# EAGLE board SpringX (EAGLE 6.4)
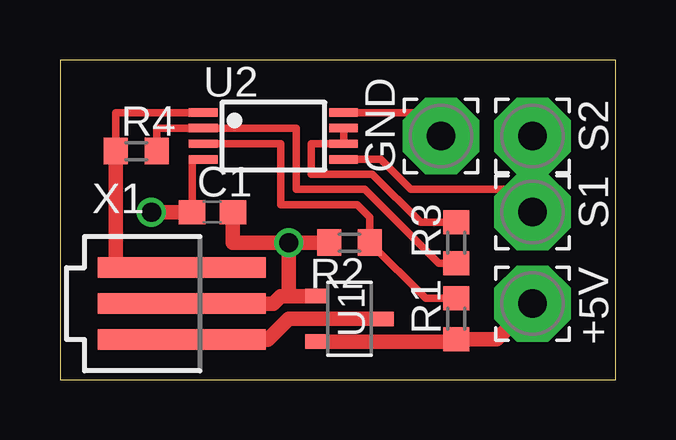
[diagram p0: board, top side]
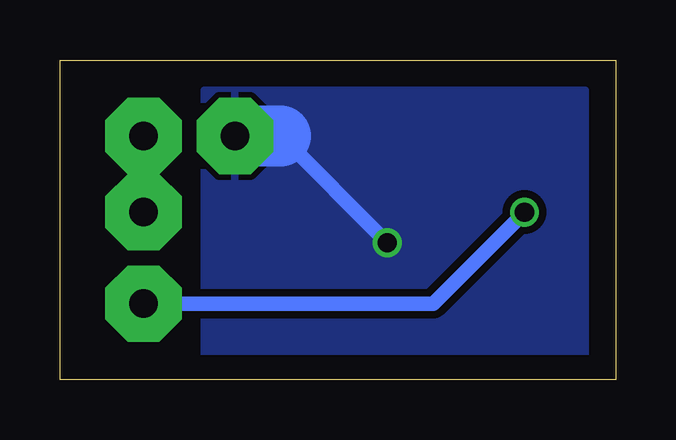
[diagram p1: board, bottom side, seen from below]

Size 23.16 x 13.32 mm. Coordinates in mm from the lower left corner, seen from the top.
Outline: 0,0 23.16,0 23.16,13.32 0,13.32 0,0
Copper layers (1*16): Top 0.035mm / dielectric 1.5mm / Bottom 0.035mm
Design rules "default": minimum track width 10mil, minimum drill 24mil, track to track 8mil, track to pad 8mil, pad to pad 8mil, via to via 8mil, smd to smd 8mil, copper to edge 40mil, drill to drill 8mil, minimum pad ring 10mil, minimum via ring 8mil, stop-mask expansion 4mil, vias tented up to drill 0mil, thermal gap 10mil

## Footprints (pad centres in the part's own frame; a part is rotated, then mirrored left to right if it is on the bottom)
3,17/1,2 = drill 1.194 pad 3.175 octagon: 1 0,0
C0603 = smd 1.1 x 1: 1 -0.85,0; 2 0.85,0
R0603 = smd 1 x 1.1: 1 -0.85,0; 2 0.85,0
SOT23A_MICROCHIP_CB = smd 0.6 x 1: 1 -0.95,-1.35; 2 0.95,-1.35; 3 0,1.35
TSSOP8 = smd 0.35 x 1.2: 1 -0.975,-2.925; 2 -0.325,-2.925; 3 0.325,-2.925; 4 0.975,-2.925; 5 0.975,2.925; 6 0.325,2.925; 7 -0.325,2.925; 8 -0.975,2.925
87438-03 = smd 7 x 0.85: 1 0,1.5; 2 0,0; 3 0,-1.5

## Placement (x,y rotation side)
+5V  WIREPAD3,17/1,2  [3,17/1,2]  19.68,3.17 270 top
C1  1uF  [C0603]  6.35,6.99 0 top
GND  WIREPAD3,17/1,2  [3,17/1,2]  15.88,10.16 90 top
R1  10K  [R0603]  16.51,2.54 90 top
R2  10K  [R0603]  12.06,5.71 180 top
R3  1K  [R0603]  16.51,5.71 90 top
R4  100K  [R0603]  3.17,9.53 0 top
S1  WIREPAD3,17/1,2  [3,17/1,2]  19.68,6.99 270 top
S2  WIREPAD3,17/1,2  [3,17/1,2]  19.68,10.16 270 top
U1  MCP1703-5002E/CB  [SOT23A_MICROCHIP_CB]  12.06,2.54 270 top
U2  MCP602ST  [TSSOP8]  8.89,10.16 270 top
X1  87438-03  [87438-03]  5.08,3.17 0 top

## Library data of the parts
+5V GND S1 S2 = wirepad
C1 R1-R4 = rcl
U1 = _hhn_MCP1703
U2 = linear
X1 = con-molex; OC_FARNELL: 1711328; OC_NEWARK: unknown

## Nets
5V: +5V.1 C1.1 R1.1 U1.2 U2.4
GND: C1.2 GND.1 R2.2 U1.1 U2.8 X1.2
N$1: U1.3 X1.3
N$2: R3.2 U2.6 U2.7
N$4: R3.1 R4.2 U2.2
OUT: R4.1 U2.1 X1.1
STR: S1.1 S2.1 U2.5
VREF: R1.2 R2.1 U2.3

## Tracks (layer width: path | path; a pad name or v marks a point on that pad's centre or on a via)
5V  (via drill 0.8)
  Top 0.305: U2.4 5.5,9.19 C1.1
  Top 0.61: U1.2 16.41,1.59 R1.1 18.2,1.69 +5V.1 | C1.1 v3.81,6.99
  Bottom 0.61: v3.81,6.99 7.62,3.17 +5V.1
GND  (via drill 0.8)
  Top 0.305: U2.8 14.9,11.13 GND.1 | 9.53,5.5 v9.53,5.71
  Top 0.61: X1.2 8.89,3.17 9.21,3.49 9.53,3.49 | U1.1 9.53,3.49 | v9.53,5.71 9.53,3.49 | R2.2 v9.53,5.71 | v9.53,5.71 7.2,5.71 C1.2
  Bottom 0.61: 13.97,10.16 v9.53,5.71
  Bottom 2.54: GND.1 13.97,10.16
  pour Bottom (isolate 0.305): 17.14,12.06 1.27,12.06 1.27,0.64 17.14,0.64
N$1
  Top 0.61: U1.3 9.53,2.54 8.66,1.68 X1.3
N$2
  Top 0.305: U2.7 U2.6 10.48,9.84 10.48,8.57 13.02,8.57 15.03,6.57 R3.2
N$4
  Top 0.305: R4.2 4.03,10.48 U2.2 9.84,10.48 9.84,7.94 12.7,7.94 15.77,4.87 R3.1
OUT
  Top 0.305: U2.1 2.33,11.13 R4.1
  Top 0.61: X1.1 2.33,4.67 R4.1
STR
  Top 0.305: U2.5 13.36,9.19 14.61,7.94 19.68,7.94
  Top 0.61: S1.1 19.68,7.94 S2.1
VREF
  Top 0.305: U2.3 9.21,9.84 9.21,7.3 12.38,7.3 12.91,6.77 R2.1 15.24,3.39 R1.2
  Top 0.61: R1.2 16.73,3.39